# EAGLE board prm (EAGLE 7.3.0)
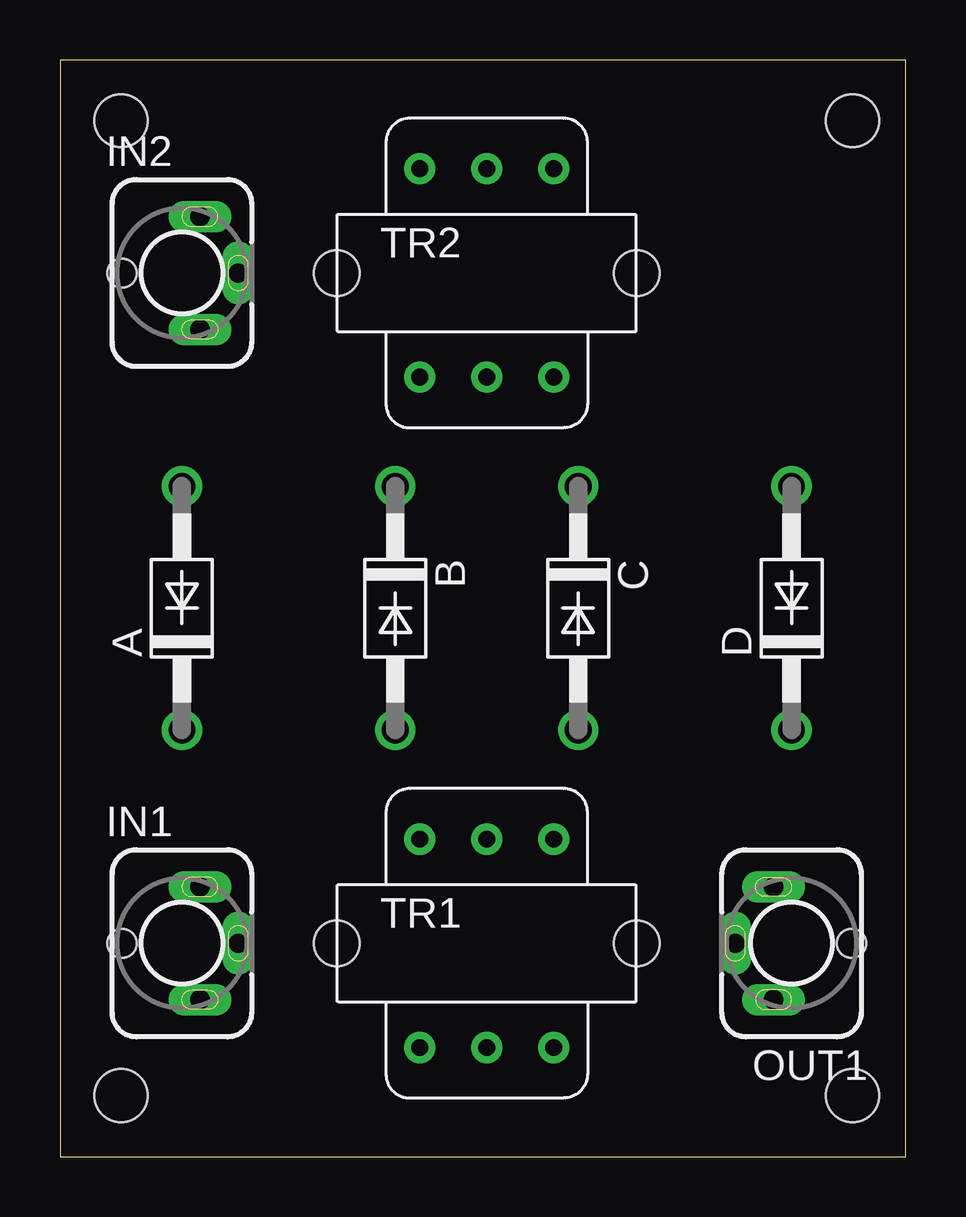
[diagram p0: board, top side]
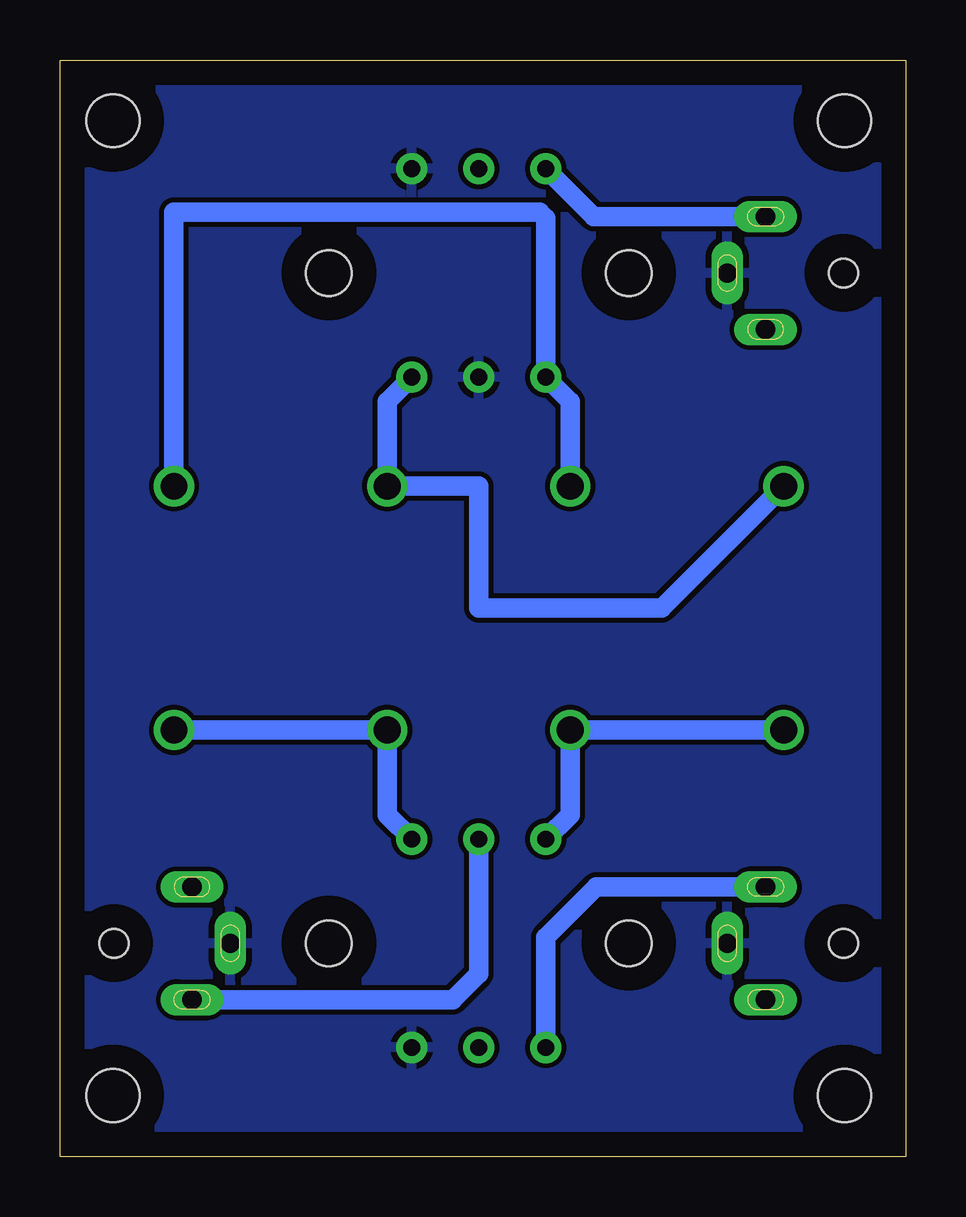
[diagram p1: board, bottom side, seen from below]

Size 35.23 x 45.71 mm. Coordinates in mm from the lower left corner, seen from the top.
Outline: 0,0 35.23,0 35.23,45.71 0,45.71 0,0
Copper layers (1*16): Top 0.035mm / dielectric 1.5mm / Bottom 0.035mm
Design rules "default": minimum track width 10mil, minimum drill 24mil, track to track 8mil, track to pad 8mil, pad to pad 8mil, via to via 8mil, smd to smd 8mil, copper to edge 40mil, drill to drill 8mil, minimum pad ring 10mil, minimum via ring 8mil, stop-mask expansion 4mil, vias tented up to drill 0mil, thermal gap 10mil
Holes 2.2 mm at 2.54,43.18 33.02,43.18 2.54,2.54 33.02,2.54

## Footprints (pad centres in the part's own frame; a part is rotated, then mirrored left to right if it is on the bottom)
DO41-10 = drill 1.118: A 5.08,0; C -5.08,0
1502_01 = drill 0.8 pad 1.2 long: 1 0,2.35; 2 -2.35,0.75; 3 2.35,0.75 | hole 1.2: 0,-2.5
42TC = drill 0.7 pad 1.3: 1 -2.794,-4.343; 2 0,-4.343; 3 2.794,-4.343; 4 2.794,4.343; 5 0,4.343; 6 -2.794,4.343 | hole 1.9: -6.248,0; 6.248,0

## Placement (x,y rotation side)
A  1N4004  [DO41-10]  5.08,22.86 90 top
B  1N4004  [DO41-10]  13.97,22.86 270 top
C  1N4004  [DO41-10]  21.59,22.86 270 top
D  1N4004  [DO41-10]  30.48,22.86 90 top
IN1  1502_01  [1502_01]  5.08,8.89 270 top
IN2  1502_01  [1502_01]  5.08,36.83 270 top
OUT1  1502_01  [1502_01]  30.48,8.89 90 top
TR1  42TC001  [42TC]  17.78,8.89 0 top
TR2  42TC001  [42TC]  17.78,36.83 0 top

## Library data of the parts
A B C D = diode
IN1 IN2 OUT1 = con-lumberg; OC_FARNELL: 4739747; OC_NEWARK: unknown
TR1 TR2 = trafo-xicon; OC_FARNELL: unknown; OC_NEWARK: unknown

## Nets
A: A.C B.A TR1.6
GND: IN1.1 IN2.1 OUT1.1 TR1.3 TR2.2 TR2.4
N$1: IN1.2 TR1.1
N$2: OUT1.2 TR1.5
N$4: B.C D.A TR2.1
N$5: A.A C.C TR2.3
N$6: C.A D.C TR1.4
N$10: IN2.2 TR2.6

## Tracks (layer width: path | path; a pad name or v marks a point on that pad's centre or on a via)
A
  Bottom 0.813: A.C B.A 13.97,14.25 TR1.6
GND
  pour Bottom: 0,45.72 35.56,45.72 35.56,0 0,0
N$1
  Bottom 0.813: IN1.2 12.89,11.24 14.99,9.14 TR1.1
N$2
  Bottom 0.813: TR1.5 17.78,7.62 18.86,6.54 OUT1.2
N$4
  Bottom 0.813: B.C 13.97,31.47 TR2.1 14.99,39.12 15.24,39.37 30.48,39.37 D.A
N$5
  Bottom 0.813: TR2.3 21.59,31.47 C.C 17.78,27.94 17.78,22.86 10.16,22.86 A.A
N$6
  Bottom 0.813: D.C C.A 21.59,14.25 TR1.4
N$10
  Bottom 0.813: IN2.2 12.99,39.18 TR2.6